# EAGLE board ai_breakout_mics5524_panel (EAGLE 6.6.0)
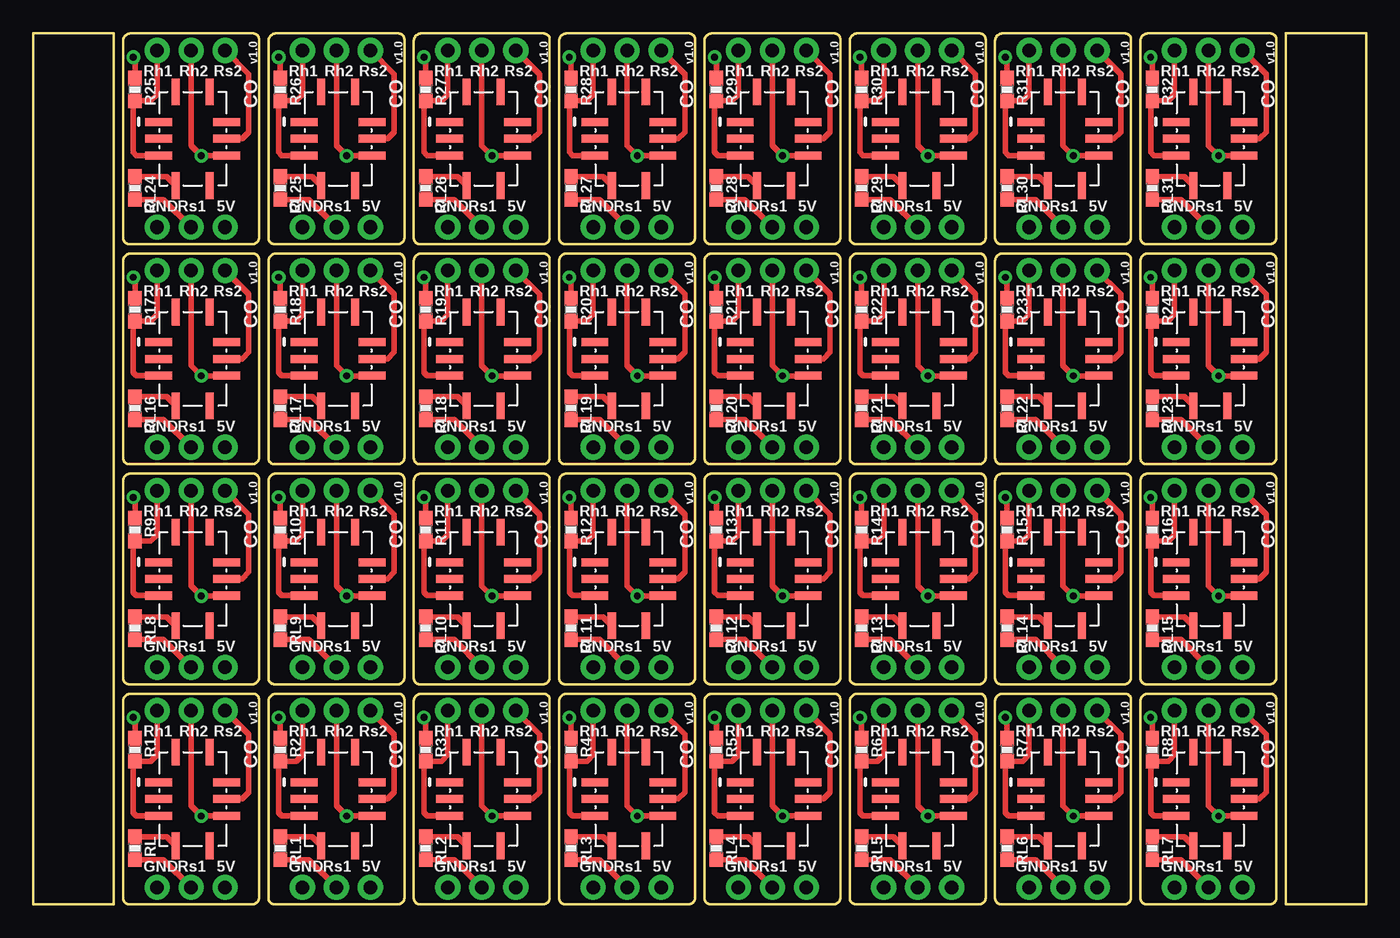
[diagram p0: board, top side]
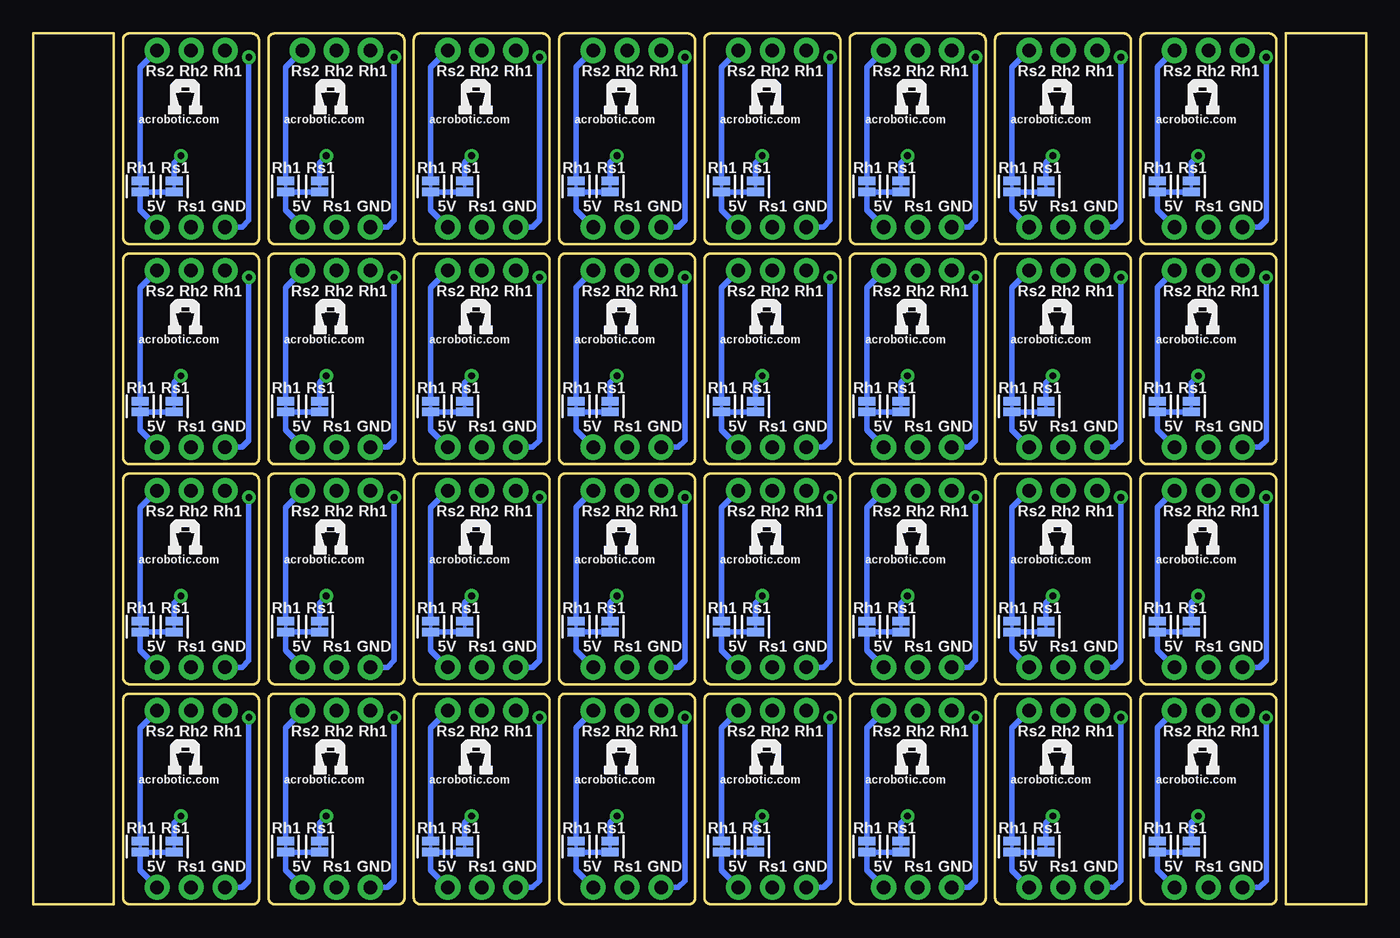
[diagram p1: board, bottom side, seen from below]

Size 99.58 x 65.09 mm. Coordinates in mm from the lower left corner, seen from the top.
Outline: 264 segments
Copper layers (1*16): Top 0.035mm / dielectric 1.5mm / Bottom 0.035mm
Design rules "ai_2layer": minimum track width 7mil, minimum drill 15mil, track to track 8mil, track to pad 8mil, pad to pad 8mil, via to via 8mil, smd to smd 8mil, copper to edge 8mil, drill to drill 8mil, minimum pad ring 12mil, minimum via ring 10mil, stop-mask expansion 4mil, vias tented up to drill 20mil, thermal gap 10mil
Net classes: 0 signal: width 0.254 mm; 1 power: width 0.305 mm

## Footprints (pad centres in the part's own frame; a part is rotated, then mirrored left to right if it is on the bottom)
1X03-NOFIRST = drill 1.016 pad 1.88: 1 -2.54,0; 2 0,0; 3 2.54,0
1X02-SJ-NCT = smd 0.635 x 1.27: 1 -0.401,0; 2 0.413,0
RES-0603 = smd 1.1 x 1: 1 -0.85,0; 2 0.85,0
MICS-SMD10 = smd 0.6 x 2: A -1.25,-2.54; B 0,-2.54; C 1.25,-2.54; F 1.25,2.54; G 0,2.54; H -1.25,2.54 | smd 2 x 0.6: D 3.5,-1.27; E 3.5,1.27; J -3.5,1.27; K -3.5,-1.27

## Placement (x,y rotation side)
J1  1X03NOFIRST  [1X03-NOFIRST]  11.78,14.48 180 top
J2  1X03NOFIRST  [1X03-NOFIRST]  11.78,1.27 180 top
J3  1X03NOFIRST  [1X03-NOFIRST]  22.64,14.48 180 top
J4  1X03NOFIRST  [1X03-NOFIRST]  22.64,1.27 180 top
J5  1X03NOFIRST  [1X03-NOFIRST]  33.5,14.48 180 top
J6  1X03NOFIRST  [1X03-NOFIRST]  33.5,1.27 180 top
J7  1X03NOFIRST  [1X03-NOFIRST]  44.36,14.48 180 top
J8  1X03NOFIRST  [1X03-NOFIRST]  44.36,1.27 180 top
J9  1X03NOFIRST  [1X03-NOFIRST]  55.22,14.48 180 top
J10  1X03NOFIRST  [1X03-NOFIRST]  55.22,1.27 180 top
J11  1X03NOFIRST  [1X03-NOFIRST]  66.08,14.48 180 top
J12  1X03NOFIRST  [1X03-NOFIRST]  66.08,1.27 180 top
J13  1X03NOFIRST  [1X03-NOFIRST]  76.94,14.48 180 top
J14  1X03NOFIRST  [1X03-NOFIRST]  76.94,1.27 180 top
J15  1X03NOFIRST  [1X03-NOFIRST]  87.8,14.48 180 top
J16  1X03NOFIRST  [1X03-NOFIRST]  87.8,1.27 180 top
J17  1X03NOFIRST  [1X03-NOFIRST]  11.78,30.93 180 top
J18  1X03NOFIRST  [1X03-NOFIRST]  11.78,17.72 180 top
J19  1X03NOFIRST  [1X03-NOFIRST]  22.64,30.93 180 top
J20  1X03NOFIRST  [1X03-NOFIRST]  22.64,17.72 180 top
J21  1X03NOFIRST  [1X03-NOFIRST]  33.5,30.93 180 top
J22  1X03NOFIRST  [1X03-NOFIRST]  33.5,17.72 180 top
J23  1X03NOFIRST  [1X03-NOFIRST]  44.36,30.93 180 top
J24  1X03NOFIRST  [1X03-NOFIRST]  44.36,17.72 180 top
J25  1X03NOFIRST  [1X03-NOFIRST]  55.22,30.93 180 top
J26  1X03NOFIRST  [1X03-NOFIRST]  55.22,17.72 180 top
J27  1X03NOFIRST  [1X03-NOFIRST]  66.08,30.93 180 top
J28  1X03NOFIRST  [1X03-NOFIRST]  66.08,17.72 180 top
J29  1X03NOFIRST  [1X03-NOFIRST]  76.94,30.93 180 top
J30  1X03NOFIRST  [1X03-NOFIRST]  76.94,17.72 180 top
J31  1X03NOFIRST  [1X03-NOFIRST]  87.8,30.93 180 top
J32  1X03NOFIRST  [1X03-NOFIRST]  87.8,17.72 180 top
J33  1X03NOFIRST  [1X03-NOFIRST]  11.78,47.37 180 top
J34  1X03NOFIRST  [1X03-NOFIRST]  11.78,34.17 180 top
J35  1X03NOFIRST  [1X03-NOFIRST]  22.64,47.37 180 top
J36  1X03NOFIRST  [1X03-NOFIRST]  22.64,34.17 180 top
J37  1X03NOFIRST  [1X03-NOFIRST]  33.5,47.37 180 top
J38  1X03NOFIRST  [1X03-NOFIRST]  33.5,34.17 180 top
J39  1X03NOFIRST  [1X03-NOFIRST]  44.36,47.37 180 top
J40  1X03NOFIRST  [1X03-NOFIRST]  44.36,34.17 180 top
J41  1X03NOFIRST  [1X03-NOFIRST]  55.22,47.37 180 top
J42  1X03NOFIRST  [1X03-NOFIRST]  55.22,34.17 180 top
J43  1X03NOFIRST  [1X03-NOFIRST]  66.08,47.37 180 top
J44  1X03NOFIRST  [1X03-NOFIRST]  66.08,34.17 180 top
J45  1X03NOFIRST  [1X03-NOFIRST]  76.94,47.37 180 top
J46  1X03NOFIRST  [1X03-NOFIRST]  76.94,34.17 180 top
J47  1X03NOFIRST  [1X03-NOFIRST]  87.8,47.37 180 top
J48  1X03NOFIRST  [1X03-NOFIRST]  87.8,34.17 180 top
J49  1X03NOFIRST  [1X03-NOFIRST]  11.78,63.82 180 top
J50  1X03NOFIRST  [1X03-NOFIRST]  11.78,50.61 180 top
J51  1X03NOFIRST  [1X03-NOFIRST]  22.64,63.82 180 top
J52  1X03NOFIRST  [1X03-NOFIRST]  22.64,50.61 180 top
J53  1X03NOFIRST  [1X03-NOFIRST]  33.5,63.82 180 top
J54  1X03NOFIRST  [1X03-NOFIRST]  33.5,50.61 180 top
J55  1X03NOFIRST  [1X03-NOFIRST]  44.36,63.82 180 top
J56  1X03NOFIRST  [1X03-NOFIRST]  44.36,50.61 180 top
J57  1X03NOFIRST  [1X03-NOFIRST]  55.22,63.82 180 top
J58  1X03NOFIRST  [1X03-NOFIRST]  55.22,50.61 180 top
J59  1X03NOFIRST  [1X03-NOFIRST]  66.08,63.82 180 top
J60  1X03NOFIRST  [1X03-NOFIRST]  66.08,50.61 180 top
J61  1X03NOFIRST  [1X03-NOFIRST]  76.94,63.82 180 top
J62  1X03NOFIRST  [1X03-NOFIRST]  76.94,50.61 180 top
J63  1X03NOFIRST  [1X03-NOFIRST]  87.8,63.82 180 top
J64  1X03NOFIRST  [1X03-NOFIRST]  87.8,50.61 180 top
JS1  1X02-SJ-NCT  [1X02-SJ-NCT]  15.59,4.32 270 bottom
JS2  1X02-SJ-NCT  [1X02-SJ-NCT]  13.05,4.32 270 bottom
JS3  1X02-SJ-NCT  [1X02-SJ-NCT]  26.45,4.32 270 bottom
JS4  1X02-SJ-NCT  [1X02-SJ-NCT]  23.91,4.32 270 bottom
JS5  1X02-SJ-NCT  [1X02-SJ-NCT]  37.31,4.32 270 bottom
JS6  1X02-SJ-NCT  [1X02-SJ-NCT]  34.77,4.32 270 bottom
JS7  1X02-SJ-NCT  [1X02-SJ-NCT]  48.17,4.32 270 bottom
JS8  1X02-SJ-NCT  [1X02-SJ-NCT]  45.63,4.32 270 bottom
JS9  1X02-SJ-NCT  [1X02-SJ-NCT]  59.03,4.32 270 bottom
JS10  1X02-SJ-NCT  [1X02-SJ-NCT]  56.49,4.32 270 bottom
JS11  1X02-SJ-NCT  [1X02-SJ-NCT]  69.89,4.32 270 bottom
JS12  1X02-SJ-NCT  [1X02-SJ-NCT]  67.35,4.32 270 bottom
JS13  1X02-SJ-NCT  [1X02-SJ-NCT]  80.75,4.32 270 bottom
JS14  1X02-SJ-NCT  [1X02-SJ-NCT]  78.21,4.32 270 bottom
JS15  1X02-SJ-NCT  [1X02-SJ-NCT]  91.61,4.32 270 bottom
JS16  1X02-SJ-NCT  [1X02-SJ-NCT]  89.07,4.32 270 bottom
JS17  1X02-SJ-NCT  [1X02-SJ-NCT]  15.59,20.77 270 bottom
JS18  1X02-SJ-NCT  [1X02-SJ-NCT]  13.05,20.77 270 bottom
JS19  1X02-SJ-NCT  [1X02-SJ-NCT]  26.45,20.77 270 bottom
JS20  1X02-SJ-NCT  [1X02-SJ-NCT]  23.91,20.77 270 bottom
JS21  1X02-SJ-NCT  [1X02-SJ-NCT]  37.31,20.77 270 bottom
JS22  1X02-SJ-NCT  [1X02-SJ-NCT]  34.77,20.77 270 bottom
JS23  1X02-SJ-NCT  [1X02-SJ-NCT]  48.17,20.77 270 bottom
JS24  1X02-SJ-NCT  [1X02-SJ-NCT]  45.63,20.77 270 bottom
JS25  1X02-SJ-NCT  [1X02-SJ-NCT]  59.03,20.77 270 bottom
JS26  1X02-SJ-NCT  [1X02-SJ-NCT]  56.49,20.77 270 bottom
JS27  1X02-SJ-NCT  [1X02-SJ-NCT]  69.89,20.77 270 bottom
JS28  1X02-SJ-NCT  [1X02-SJ-NCT]  67.35,20.77 270 bottom
JS29  1X02-SJ-NCT  [1X02-SJ-NCT]  80.75,20.77 270 bottom
JS30  1X02-SJ-NCT  [1X02-SJ-NCT]  78.21,20.77 270 bottom
JS31  1X02-SJ-NCT  [1X02-SJ-NCT]  91.61,20.77 270 bottom
JS32  1X02-SJ-NCT  [1X02-SJ-NCT]  89.07,20.77 270 bottom
JS33  1X02-SJ-NCT  [1X02-SJ-NCT]  15.59,37.21 270 bottom
JS34  1X02-SJ-NCT  [1X02-SJ-NCT]  13.05,37.21 270 bottom
JS35  1X02-SJ-NCT  [1X02-SJ-NCT]  26.45,37.21 270 bottom
JS36  1X02-SJ-NCT  [1X02-SJ-NCT]  23.91,37.21 270 bottom
JS37  1X02-SJ-NCT  [1X02-SJ-NCT]  37.31,37.21 270 bottom
JS38  1X02-SJ-NCT  [1X02-SJ-NCT]  34.77,37.21 270 bottom
JS39  1X02-SJ-NCT  [1X02-SJ-NCT]  48.17,37.21 270 bottom
JS40  1X02-SJ-NCT  [1X02-SJ-NCT]  45.63,37.21 270 bottom
JS41  1X02-SJ-NCT  [1X02-SJ-NCT]  59.03,37.21 270 bottom
JS42  1X02-SJ-NCT  [1X02-SJ-NCT]  56.49,37.21 270 bottom
JS43  1X02-SJ-NCT  [1X02-SJ-NCT]  69.89,37.21 270 bottom
JS44  1X02-SJ-NCT  [1X02-SJ-NCT]  67.35,37.21 270 bottom
JS45  1X02-SJ-NCT  [1X02-SJ-NCT]  80.75,37.21 270 bottom
JS46  1X02-SJ-NCT  [1X02-SJ-NCT]  78.21,37.21 270 bottom
JS47  1X02-SJ-NCT  [1X02-SJ-NCT]  91.61,37.21 270 bottom
JS48  1X02-SJ-NCT  [1X02-SJ-NCT]  89.07,37.21 270 bottom
JS49  1X02-SJ-NCT  [1X02-SJ-NCT]  15.59,53.66 270 bottom
JS50  1X02-SJ-NCT  [1X02-SJ-NCT]  13.05,53.66 270 bottom
JS51  1X02-SJ-NCT  [1X02-SJ-NCT]  26.45,53.66 270 bottom
JS52  1X02-SJ-NCT  [1X02-SJ-NCT]  23.91,53.66 270 bottom
JS53  1X02-SJ-NCT  [1X02-SJ-NCT]  37.31,53.66 270 bottom
JS54  1X02-SJ-NCT  [1X02-SJ-NCT]  34.77,53.66 270 bottom
JS55  1X02-SJ-NCT  [1X02-SJ-NCT]  48.17,53.66 270 bottom
JS56  1X02-SJ-NCT  [1X02-SJ-NCT]  45.63,53.66 270 bottom
JS57  1X02-SJ-NCT  [1X02-SJ-NCT]  59.03,53.66 270 bottom
JS58  1X02-SJ-NCT  [1X02-SJ-NCT]  56.49,53.66 270 bottom
JS59  1X02-SJ-NCT  [1X02-SJ-NCT]  69.89,53.66 270 bottom
JS60  1X02-SJ-NCT  [1X02-SJ-NCT]  67.35,53.66 270 bottom
JS61  1X02-SJ-NCT  [1X02-SJ-NCT]  80.75,53.66 270 bottom
JS62  1X02-SJ-NCT  [1X02-SJ-NCT]  78.21,53.66 270 bottom
JS63  1X02-SJ-NCT  [1X02-SJ-NCT]  91.61,53.66 270 bottom
JS64  1X02-SJ-NCT  [1X02-SJ-NCT]  89.07,53.66 270 bottom
R1  82  [RES-0603]  7.59,11.56 270 top
R2  82  [RES-0603]  18.45,11.56 270 top
R3  82  [RES-0603]  29.31,11.56 270 top
R4  82  [RES-0603]  40.17,11.56 270 top
R5  82  [RES-0603]  51.03,11.56 270 top
R6  82  [RES-0603]  61.89,11.56 270 top
R7  82  [RES-0603]  72.75,11.56 270 top
R8  82  [RES-0603]  83.61,11.56 270 top
R9  82  [RES-0603]  7.59,28 270 top
R10  82  [RES-0603]  18.45,28 270 top
R11  82  [RES-0603]  29.31,28 270 top
R12  82  [RES-0603]  40.17,28 270 top
R13  82  [RES-0603]  51.03,28 270 top
R14  82  [RES-0603]  61.89,28 270 top
R15  82  [RES-0603]  72.75,28 270 top
R16  82  [RES-0603]  83.61,28 270 top
R17  82  [RES-0603]  7.59,44.45 270 top
R18  82  [RES-0603]  18.45,44.45 270 top
R19  82  [RES-0603]  29.31,44.45 270 top
R20  82  [RES-0603]  40.17,44.45 270 top
R21  82  [RES-0603]  51.03,44.45 270 top
R22  82  [RES-0603]  61.89,44.45 270 top
R23  82  [RES-0603]  72.75,44.45 270 top
R24  82  [RES-0603]  83.61,44.45 270 top
R25  82  [RES-0603]  7.59,60.9 270 top
R26  82  [RES-0603]  18.45,60.9 270 top
R27  82  [RES-0603]  29.31,60.9 270 top
R28  82  [RES-0603]  40.17,60.9 270 top
R29  82  [RES-0603]  51.03,60.9 270 top
R30  82  [RES-0603]  61.89,60.9 270 top
R31  82  [RES-0603]  72.75,60.9 270 top
R32  82  [RES-0603]  83.61,60.9 270 top
RL  820  [RES-0603]  7.59,4.19 270 top
RL1  820  [RES-0603]  18.45,4.19 270 top
RL2  820  [RES-0603]  29.31,4.19 270 top
RL3  820  [RES-0603]  40.17,4.19 270 top
RL4  820  [RES-0603]  51.03,4.19 270 top
RL5  820  [RES-0603]  61.89,4.19 270 top
RL6  820  [RES-0603]  72.75,4.19 270 top
RL7  820  [RES-0603]  83.61,4.19 270 top
RL8  820  [RES-0603]  7.59,20.64 270 top
RL9  820  [RES-0603]  18.45,20.64 270 top
RL10  820  [RES-0603]  29.31,20.64 270 top
RL11  820  [RES-0603]  40.17,20.64 270 top
RL12  820  [RES-0603]  51.03,20.64 270 top
RL13  820  [RES-0603]  61.89,20.64 270 top
RL14  820  [RES-0603]  72.75,20.64 270 top
RL15  820  [RES-0603]  83.61,20.64 270 top
RL16  820  [RES-0603]  7.59,37.09 270 top
RL17  820  [RES-0603]  18.45,37.09 270 top
RL18  820  [RES-0603]  29.31,37.09 270 top
RL19  820  [RES-0603]  40.17,37.09 270 top
RL20  820  [RES-0603]  51.03,37.09 270 top
RL21  820  [RES-0603]  61.89,37.09 270 top
RL22  820  [RES-0603]  72.75,37.09 270 top
RL23  820  [RES-0603]  83.61,37.09 270 top
RL24  820  [RES-0603]  7.59,53.53 270 top
RL25  820  [RES-0603]  18.45,53.53 270 top
RL26  820  [RES-0603]  29.31,53.53 270 top
RL27  820  [RES-0603]  40.17,53.53 270 top
RL28  820  [RES-0603]  51.03,53.53 270 top
RL29  820  [RES-0603]  61.89,53.53 270 top
RL30  820  [RES-0603]  72.75,53.53 270 top
RL31  820  [RES-0603]  83.61,53.53 270 top
U1  MICS-5524  [MICS-SMD10]  22.77,7.87 270 top
U2  MICS-5524  [MICS-SMD10]  11.91,7.87 270 top
U3  MICS-5524  [MICS-SMD10]  33.63,7.87 270 top
U4  MICS-5524  [MICS-SMD10]  44.49,7.87 270 top
U5  MICS-5524  [MICS-SMD10]  55.35,7.87 270 top
U6  MICS-5524  [MICS-SMD10]  66.21,7.87 270 top
U7  MICS-5524  [MICS-SMD10]  77.07,7.87 270 top
U8  MICS-5524  [MICS-SMD10]  87.93,7.87 270 top
U9  MICS-5524  [MICS-SMD10]  11.91,24.32 270 top
U10  MICS-5524  [MICS-SMD10]  22.77,24.32 270 top
U11  MICS-5524  [MICS-SMD10]  33.63,24.32 270 top
U12  MICS-5524  [MICS-SMD10]  44.49,24.32 270 top
U13  MICS-5524  [MICS-SMD10]  55.35,24.32 270 top
U14  MICS-5524  [MICS-SMD10]  66.21,24.32 270 top
U15  MICS-5524  [MICS-SMD10]  77.07,24.32 270 top
U16  MICS-5524  [MICS-SMD10]  87.93,24.32 270 top
U17  MICS-5524  [MICS-SMD10]  11.91,40.77 270 top
U18  MICS-5524  [MICS-SMD10]  22.77,40.77 270 top
U19  MICS-5524  [MICS-SMD10]  33.63,40.77 270 top
U20  MICS-5524  [MICS-SMD10]  44.49,40.77 270 top
U21  MICS-5524  [MICS-SMD10]  55.35,40.77 270 top
U22  MICS-5524  [MICS-SMD10]  66.21,40.77 270 top
U23  MICS-5524  [MICS-SMD10]  77.07,40.77 270 top
U24  MICS-5524  [MICS-SMD10]  87.93,40.77 270 top
U25  MICS-5524  [MICS-SMD10]  11.91,57.22 270 top
U26  MICS-5524  [MICS-SMD10]  22.77,57.22 270 top
U27  MICS-5524  [MICS-SMD10]  33.63,57.22 270 top
U28  MICS-5524  [MICS-SMD10]  44.49,57.22 270 top
U29  MICS-5524  [MICS-SMD10]  55.35,57.22 270 top
U30  MICS-5524  [MICS-SMD10]  66.21,57.22 270 top
U31  MICS-5524  [MICS-SMD10]  77.07,57.22 270 top
U32  MICS-5524  [MICS-SMD10]  87.93,57.22 270 top
U$1  AI-LOGOXS  [AI-LOGO-XS]  24.42,9.65 0 bottom
U$2  AI-LOGOXS  [AI-LOGO-XS]  35.28,9.65 0 bottom
U$3  AI-LOGOXS  [AI-LOGO-XS]  13.56,9.65 0 bottom
U$4  AI-LOGOXS  [AI-LOGO-XS]  46.14,9.65 0 bottom
U$5  AI-LOGOXS  [AI-LOGO-XS]  57,9.65 0 bottom
U$6  AI-LOGOXS  [AI-LOGO-XS]  67.86,9.65 0 bottom
U$7  AI-LOGOXS  [AI-LOGO-XS]  78.72,9.65 0 bottom
U$8  AI-LOGOXS  [AI-LOGO-XS]  89.58,9.65 0 bottom
U$9  AI-LOGOXS  [AI-LOGO-XS]  13.56,26.1 0 bottom
U$10  AI-LOGOXS  [AI-LOGO-XS]  24.42,26.1 0 bottom
U$11  AI-LOGOXS  [AI-LOGO-XS]  35.28,26.1 0 bottom
U$12  AI-LOGOXS  [AI-LOGO-XS]  46.14,26.1 0 bottom
U$13  AI-LOGOXS  [AI-LOGO-XS]  57,26.1 0 bottom
U$14  AI-LOGOXS  [AI-LOGO-XS]  67.86,26.1 0 bottom
U$15  AI-LOGOXS  [AI-LOGO-XS]  78.72,26.1 0 bottom
U$16  AI-LOGOXS  [AI-LOGO-XS]  89.58,26.1 0 bottom
U$17  AI-LOGOXS  [AI-LOGO-XS]  13.56,42.55 0 bottom
U$18  AI-LOGOXS  [AI-LOGO-XS]  24.42,42.55 0 bottom
U$19  AI-LOGOXS  [AI-LOGO-XS]  35.28,42.55 0 bottom
U$20  AI-LOGOXS  [AI-LOGO-XS]  46.14,42.55 0 bottom
U$21  AI-LOGOXS  [AI-LOGO-XS]  57,42.55 0 bottom
U$22  AI-LOGOXS  [AI-LOGO-XS]  67.86,42.55 0 bottom
U$23  AI-LOGOXS  [AI-LOGO-XS]  78.72,42.55 0 bottom
U$24  AI-LOGOXS  [AI-LOGO-XS]  89.58,42.55 0 bottom
U$25  AI-LOGOXS  [AI-LOGO-XS]  13.56,59 0 bottom
U$26  AI-LOGOXS  [AI-LOGO-XS]  24.42,59 0 bottom
U$27  AI-LOGOXS  [AI-LOGO-XS]  35.28,59 0 bottom
U$28  AI-LOGOXS  [AI-LOGO-XS]  46.14,59 0 bottom
U$29  AI-LOGOXS  [AI-LOGO-XS]  57,59 0 bottom
U$30  AI-LOGOXS  [AI-LOGO-XS]  67.86,59 0 bottom
U$31  AI-LOGOXS  [AI-LOGO-XS]  78.72,59 0 bottom
U$32  AI-LOGOXS  [AI-LOGO-XS]  89.58,59 0 bottom

## Library data of the parts
J1-J64 JS1-JS64 = Ai_Connectors
R1-R32 RL RL1-RL31 = Ai_Passives
U1-U32 = Ai_IC
U$1-U$32 = Ai_Miscellany

## Nets
5V [power]: J2.1 JS1.2 JS2.2
5V1 [power]: J4.1 JS3.2 JS4.2
5V2 [power]: J6.1 JS5.2 JS6.2
5V3 [power]: J8.1 JS7.2 JS8.2
5V4 [power]: J10.1 JS9.2 JS10.2
5V5 [power]: J12.1 JS11.2 JS12.2
5V6 [power]: J14.1 JS13.2 JS14.2
5V7 [power]: J16.1 JS15.2 JS16.2
5V8 [power]: J18.1 JS17.2 JS18.2
5V9 [power]: J20.1 JS19.2 JS20.2
5V10 [power]: J22.1 JS21.2 JS22.2
5V11 [power]: J24.1 JS23.2 JS24.2
5V12 [power]: J26.1 JS25.2 JS26.2
5V13 [power]: J28.1 JS27.2 JS28.2
5V14 [power]: J30.1 JS29.2 JS30.2
5V15 [power]: J32.1 JS31.2 JS32.2
5V16 [power]: J34.1 JS33.2 JS34.2
5V17 [power]: J36.1 JS35.2 JS36.2
5V18 [power]: J38.1 JS37.2 JS38.2
5V19 [power]: J40.1 JS39.2 JS40.2
5V20 [power]: J42.1 JS41.2 JS42.2
5V21 [power]: J44.1 JS43.2 JS44.2
5V22 [power]: J46.1 JS45.2 JS46.2
5V23 [power]: J48.1 JS47.2 JS48.2
5V24 [power]: J50.1 JS49.2 JS50.2
5V25 [power]: J52.1 JS51.2 JS52.2
5V26 [power]: J54.1 JS53.2 JS54.2
5V27 [power]: J56.1 JS55.2 JS56.2
5V28 [power]: J58.1 JS57.2 JS58.2
5V29 [power]: J60.1 JS59.2 JS60.2
5V30 [power]: J62.1 JS61.2 JS62.2
5V31 [power]: J64.1 JS63.2 JS64.2
A/RH1: J1.3 R1.2 U2.C
A/RH2: J3.3 R2.2 U1.C
A/RH3: J5.3 R3.2 U3.C
A/RH4: J7.3 R4.2 U4.C
A/RH5: J9.3 R5.2 U5.C
A/RH6: J11.3 R6.2 U6.C
A/RH7: J13.3 R7.2 U7.C
A/RH8: J15.3 R8.2 U8.C
A/RH9: J17.3 R9.2 U9.C
A/RH10: J19.3 R10.2 U10.C
A/RH11: J21.3 R11.2 U11.C
A/RH12: J23.3 R12.2 U12.C
A/RH13: J25.3 R13.2 U13.C
A/RH14: J27.3 R14.2 U14.C
A/RH15: J29.3 R15.2 U15.C
A/RH16: J31.3 R16.2 U16.C
A/RH17: J33.3 R17.2 U17.C
A/RH18: J35.3 R18.2 U18.C
A/RH19: J37.3 R19.2 U19.C
A/RH20: J39.3 R20.2 U20.C
A/RH21: J41.3 R21.2 U21.C
A/RH22: J43.3 R22.2 U22.C
A/RH23: J45.3 R23.2 U23.C
A/RH24: J47.3 R24.2 U24.C
A/RH25: J49.3 R25.2 U25.C
A/RH26: J51.3 R26.2 U26.C
A/RH27: J53.3 R27.2 U27.C
A/RH28: J55.3 R28.2 U28.C
A/RH29: J57.3 R29.2 U29.C
A/RH30: J59.3 R30.2 U30.C
A/RH31: J61.3 R31.2 U31.C
A/RH32: J63.3 R32.2 U32.C
B/RS1: J2.2 RL.2
B/RS2: J4.2 RL1.2
B/RS3: J6.2 RL2.2
B/RS4: J8.2 RL3.2
B/RS5: J10.2 RL4.2
B/RS6: J12.2 RL5.2
B/RS7: J14.2 RL6.2
B/RS8: J16.2 RL7.2
B/RS9: J18.2 RL8.2
B/RS10: J20.2 RL9.2
B/RS11: J22.2 RL10.2
B/RS12: J24.2 RL11.2
B/RS13: J26.2 RL12.2
B/RS14: J28.2 RL13.2
B/RS15: J30.2 RL14.2
B/RS16: J32.2 RL15.2
B/RS17: J34.2 RL16.2
B/RS18: J36.2 RL17.2
B/RS19: J38.2 RL18.2
B/RS20: J40.2 RL19.2
B/RS21: J42.2 RL20.2
B/RS22: J44.2 RL21.2
B/RS23: J46.2 RL22.2
B/RS24: J48.2 RL23.2
B/RS25: J50.2 RL24.2
B/RS26: J52.2 RL25.2
B/RS27: J54.2 RL26.2
B/RS28: J56.2 RL27.2
B/RS29: J58.2 RL28.2
B/RS30: J60.2 RL29.2
B/RS31: J62.2 RL30.2
B/RS32: J64.2 RL31.2
GND [power]: J2.3 R1.1
GND1 [power]: J4.3 R2.1
GND2 [power]: J6.3 R3.1
GND3 [power]: J8.3 R4.1
GND4 [power]: J10.3 R5.1
GND5 [power]: J12.3 R6.1
GND6 [power]: J14.3 R7.1
GND7 [power]: J16.3 R8.1
GND8 [power]: J18.3 R9.1
GND9 [power]: J20.3 R10.1
GND10 [power]: J22.3 R11.1
GND11 [power]: J24.3 R12.1
GND12 [power]: J26.3 R13.1
GND13 [power]: J28.3 R14.1
GND14 [power]: J30.3 R15.1
GND15 [power]: J32.3 R16.1
GND16 [power]: J34.3 R17.1
GND17 [power]: J36.3 R18.1
GND18 [power]: J38.3 R19.1
GND19 [power]: J40.3 R20.1
GND20 [power]: J42.3 R21.1
GND21 [power]: J44.3 R22.1
GND22 [power]: J46.3 R23.1
GND23 [power]: J48.3 R24.1
GND24 [power]: J50.3 R25.1
GND25 [power]: J52.3 R26.1
GND26 [power]: J54.3 R27.1
GND27 [power]: J56.3 R28.1
GND28 [power]: J58.3 R29.1
GND29 [power]: J60.3 R30.1
GND30 [power]: J62.3 R31.1
GND31 [power]: J64.3 R32.1
H/RH1: J3.2 JS4.1 U1.F
H/RH2: J1.2 JS2.1 U2.F
H/RH3: J5.2 JS6.1 U3.F
H/RH4: J7.2 JS8.1 U4.F
H/RH5: J9.2 JS10.1 U5.F
H/RH6: J11.2 JS12.1 U6.F
H/RH7: J13.2 JS14.1 U7.F
H/RH8: J15.2 JS16.1 U8.F
H/RH9: J17.2 JS18.1 U9.F
H/RH10: J19.2 JS20.1 U10.F
H/RH11: J21.2 JS22.1 U11.F
H/RH12: J23.2 JS24.1 U12.F
H/RH13: J25.2 JS26.1 U13.F
H/RH14: J27.2 JS28.1 U14.F
H/RH15: J29.2 JS30.1 U15.F
H/RH16: J31.2 JS32.1 U16.F
H/RH17: J33.2 JS34.1 U17.F
H/RH18: J35.2 JS36.1 U18.F
H/RH19: J37.2 JS38.1 U19.F
H/RH20: J39.2 JS40.1 U20.F
H/RH21: J41.2 JS42.1 U21.F
H/RH22: J43.2 JS44.1 U22.F
H/RH23: J45.2 JS46.1 U23.F
H/RH24: J47.2 JS48.1 U24.F
H/RH25: J49.2 JS50.1 U25.F
H/RH26: J51.2 JS52.1 U26.F
H/RH27: J53.2 JS54.1 U27.F
H/RH28: J55.2 JS56.1 U28.F
H/RH29: J57.2 JS58.1 U29.F
H/RH30: J59.2 JS60.1 U30.F
H/RH31: J61.2 JS62.1 U31.F
H/RH32: J63.2 JS64.1 U32.F
J/RS1: J3.1 JS3.1 U1.G
J/RS2: J1.1 JS1.1 U2.G
J/RS3: J5.1 JS5.1 U3.G
J/RS4: J7.1 JS7.1 U4.G
J/RS5: J9.1 JS9.1 U5.G
J/RS6: J11.1 JS11.1 U6.G
J/RS7: J13.1 JS13.1 U7.G
J/RS8: J15.1 JS15.1 U8.G
J/RS9: J17.1 JS17.1 U9.G
J/RS10: J19.1 JS19.1 U10.G
J/RS11: J21.1 JS21.1 U11.G
J/RS12: J23.1 JS23.1 U12.G
J/RS13: J25.1 JS25.1 U13.G
J/RS14: J27.1 JS27.1 U14.G
J/RS15: J29.1 JS29.1 U15.G
J/RS16: J31.1 JS31.1 U16.G
J/RS17: J33.1 JS33.1 U17.G
J/RS18: J35.1 JS35.1 U18.G
J/RS19: J37.1 JS37.1 U19.G
J/RS20: J39.1 JS39.1 U20.G
J/RS21: J41.1 JS41.1 U21.G
J/RS22: J43.1 JS43.1 U22.G
J/RS23: J45.1 JS45.1 U23.G
J/RS24: J47.1 JS47.1 U24.G
J/RS25: J49.1 JS49.1 U25.G
J/RS26: J51.1 JS51.1 U26.G
J/RS27: J53.1 JS53.1 U27.G
J/RS28: J55.1 JS55.1 U28.G
J/RS29: J57.1 JS57.1 U29.G
J/RS30: J59.1 JS59.1 U30.G
J/RS31: J61.1 JS61.1 U31.G
J/RS32: J63.1 JS63.1 U32.G
N$1: RL.1 U2.D
N$2: RL1.1 U1.D
N$3: RL2.1 U3.D
N$4: RL3.1 U4.D
N$5: RL4.1 U5.D
N$6: RL5.1 U6.D
N$7: RL6.1 U7.D
N$8: RL7.1 U8.D
N$9: RL8.1 U9.D
N$10: RL9.1 U10.D
N$11: RL10.1 U11.D
N$12: RL11.1 U12.D
N$13: RL12.1 U13.D
N$14: RL13.1 U14.D
N$15: RL14.1 U15.D
N$16: RL15.1 U16.D
N$17: RL16.1 U17.D
N$18: RL17.1 U18.D
N$19: RL18.1 U19.D
N$20: RL19.1 U20.D
N$21: RL20.1 U21.D
N$22: RL21.1 U22.D
N$23: RL22.1 U23.D
N$24: RL23.1 U24.D
N$25: RL24.1 U25.D
N$26: RL25.1 U26.D
N$27: RL26.1 U27.D
N$28: RL27.1 U28.D
N$29: RL28.1 U29.D
N$30: RL29.1 U30.D
N$31: RL30.1 U31.D
N$32: RL31.1 U32.D

## Tracks (layer width: path | path; a pad name or v marks a point on that pad's centre or on a via)
5V
  Bottom 0.406: J2.1 15.59,2.54 JS1.2 JS2.2
5V1
  Bottom 0.406: J4.1 26.45,2.54 JS3.2 JS4.2
5V2
  Bottom 0.406: J6.1 37.31,2.54 JS5.2 JS6.2
5V3
  Bottom 0.406: J8.1 48.17,2.54 JS7.2 JS8.2
5V4
  Bottom 0.406: J10.1 59.03,2.54 JS9.2 JS10.2
5V5
  Bottom 0.406: J12.1 69.89,2.54 JS11.2 JS12.2
5V6
  Bottom 0.406: J14.1 80.75,2.54 JS13.2 JS14.2
5V7
  Bottom 0.406: J16.1 91.61,2.54 JS15.2 JS16.2
5V8
  Bottom 0.406: J18.1 15.59,18.99 JS17.2 JS18.2
5V9
  Bottom 0.406: J20.1 26.45,18.99 JS19.2 JS20.2
5V10
  Bottom 0.406: J22.1 37.31,18.99 JS21.2 JS22.2
5V11
  Bottom 0.406: J24.1 48.17,18.99 JS23.2 JS24.2
5V12
  Bottom 0.406: J26.1 59.03,18.99 JS25.2 JS26.2
5V13
  Bottom 0.406: J28.1 69.89,18.99 JS27.2 JS28.2
5V14
  Bottom 0.406: J30.1 80.75,18.99 JS29.2 JS30.2
5V15
  Bottom 0.406: J32.1 91.61,18.99 JS31.2 JS32.2
5V16
  Bottom 0.406: J34.1 15.59,35.44 JS33.2 JS34.2
5V17
  Bottom 0.406: J36.1 26.45,35.44 JS35.2 JS36.2
5V18
  Bottom 0.406: J38.1 37.31,35.44 JS37.2 JS38.2
5V19
  Bottom 0.406: J40.1 48.17,35.44 JS39.2 JS40.2
5V20
  Bottom 0.406: J42.1 59.03,35.44 JS41.2 JS42.2
5V21
  Bottom 0.406: J44.1 69.89,35.44 JS43.2 JS44.2
5V22
  Bottom 0.406: J46.1 80.75,35.44 JS45.2 JS46.2
5V23
  Bottom 0.406: J48.1 91.61,35.44 JS47.2 JS48.2
5V24
  Bottom 0.406: J50.1 15.59,51.88 JS49.2 JS50.2
5V25
  Bottom 0.406: J52.1 26.45,51.88 JS51.2 JS52.2
5V26
  Bottom 0.406: J54.1 37.31,51.88 JS53.2 JS54.2
5V27
  Bottom 0.406: J56.1 48.17,51.88 JS55.2 JS56.2
5V28
  Bottom 0.406: J58.1 59.03,51.88 JS57.2 JS58.2
5V29
  Bottom 0.406: J60.1 69.89,51.88 JS59.2 JS60.2
5V30
  Bottom 0.406: J62.1 80.75,51.88 JS61.2 JS62.2
5V31
  Bottom 0.406: J64.1 91.61,51.88 JS63.2 JS64.2
A/RH1
  Top 0.406: U2.C 7.7,6.62 7.46,6.86 7.46,10.58 R1.2 8.77,10.71 9.24,11.18 J1.3
A/RH2
  Top 0.406: U1.C 18.56,6.62 18.32,6.86 18.32,10.58 R2.2 19.63,10.71 20.1,11.18 J3.3
A/RH3
  Top 0.406: U3.C 29.42,6.62 29.18,6.86 29.18,10.58 R3.2 30.49,10.71 30.96,11.18 J5.3
A/RH4
  Top 0.406: U4.C 40.28,6.62 40.04,6.86 40.04,10.58 R4.2 41.35,10.71 41.82,11.18 J7.3
A/RH5
  Top 0.406: U5.C 51.14,6.62 50.9,6.86 50.9,10.58 R5.2 52.21,10.71 52.68,11.18 J9.3
A/RH6
  Top 0.406: U6.C 62,6.62 61.76,6.86 61.76,10.58 R6.2 63.07,10.71 63.54,11.18 J11.3
A/RH7
  Top 0.406: U7.C 72.86,6.62 72.62,6.86 72.62,10.58 R7.2 73.93,10.71 74.4,11.18 J13.3
A/RH8
  Top 0.406: U8.C 83.72,6.62 83.48,6.86 83.48,10.58 R8.2 84.79,10.71 85.26,11.18 J15.3
A/RH9
  Top 0.406: U9.C 7.7,23.07 7.46,23.31 7.46,27.03 R9.2 8.77,27.16 9.24,27.62 J17.3
A/RH10
  Top 0.406: U10.C 18.56,23.07 18.32,23.31 18.32,27.03 R10.2 19.63,27.16 20.1,27.62 J19.3
A/RH11
  Top 0.406: U11.C 29.42,23.07 29.18,23.31 29.18,27.03 R11.2 30.49,27.16 30.96,27.62 J21.3
A/RH12
  Top 0.406: U12.C 40.28,23.07 40.04,23.31 40.04,27.03 R12.2 41.35,27.16 41.82,27.62 J23.3
A/RH13
  Top 0.406: U13.C 51.14,23.07 50.9,23.31 50.9,27.03 R13.2 52.21,27.16 52.68,27.62 J25.3
A/RH14
  Top 0.406: U14.C 62,23.07 61.76,23.31 61.76,27.03 R14.2 63.07,27.16 63.54,27.62 J27.3
A/RH15
  Top 0.406: U15.C 72.86,23.07 72.62,23.31 72.62,27.03 R15.2 73.93,27.16 74.4,27.62 J29.3
A/RH16
  Top 0.406: U16.C 83.72,23.07 83.48,23.31 83.48,27.03 R16.2 84.79,27.16 85.26,27.62 J31.3
A/RH17
  Top 0.406: U17.C 7.7,39.52 7.46,39.75 7.46,43.48 R17.2 8.77,43.6 9.24,44.07 J33.3
A/RH18
  Top 0.406: U18.C 18.56,39.52 18.32,39.75 18.32,43.48 R18.2 19.63,43.6 20.1,44.07 J35.3
A/RH19
  Top 0.406: U19.C 29.42,39.52 29.18,39.75 29.18,43.48 R19.2 30.49,43.6 30.96,44.07 J37.3
A/RH20
  Top 0.406: U20.C 40.28,39.52 40.04,39.75 40.04,43.48 R20.2 41.35,43.6 41.82,44.07 J39.3
A/RH21
  Top 0.406: U21.C 51.14,39.52 50.9,39.75 50.9,43.48 R21.2 52.21,43.6 52.68,44.07 J41.3
A/RH22
  Top 0.406: U22.C 62,39.52 61.76,39.75 61.76,43.48 R22.2 63.07,43.6 63.54,44.07 J43.3
A/RH23
  Top 0.406: U23.C 72.86,39.52 72.62,39.75 72.62,43.48 R23.2 73.93,43.6 74.4,44.07 J45.3
A/RH24
  Top 0.406: U24.C 83.72,39.52 83.48,39.75 83.48,43.48 R24.2 84.79,43.6 85.26,44.07 J47.3
A/RH25
  Top 0.406: U25.C 7.7,55.97 7.46,56.2 7.46,59.92 R25.2 8.77,60.05 9.24,60.52 J49.3
A/RH26
  Top 0.406: U26.C 18.56,55.97 18.32,56.2 18.32,59.92 R26.2 19.63,60.05 20.1,60.52 J51.3
A/RH27
  Top 0.406: U27.C 29.42,55.97 29.18,56.2 29.18,59.92 R27.2 30.49,60.05 30.96,60.52 J53.3
A/RH28
  Top 0.406: U28.C 40.28,55.97 40.04,56.2 40.04,59.92 R28.2 41.35,60.05 41.82,60.52 J55.3
A/RH29
  Top 0.406: U29.C 51.14,55.97 50.9,56.2 50.9,59.92 R29.2 52.21,60.05 52.68,60.52 J57.3
A/RH30
  Top 0.406: U30.C 62,55.97 61.76,56.2 61.76,59.92 R30.2 63.07,60.05 63.54,60.52 J59.3
A/RH31
  Top 0.406: U31.C 72.86,55.97 72.62,56.2 72.62,59.92 R31.2 73.93,60.05 74.4,60.52 J61.3
A/RH32
  Top 0.406: U32.C 83.72,55.97 83.48,56.2 83.48,59.92 R32.2 84.79,60.05 85.26,60.52 J63.3
B/RS1
  Top 0.406: RL.2 9.71,3.34 J2.2
B/RS2
  Top 0.406: RL1.2 20.57,3.34 J4.2
B/RS3
  Top 0.406: RL2.2 31.43,3.34 J6.2
B/RS4
  Top 0.406: RL3.2 42.29,3.34 J8.2
B/RS5
  Top 0.406: RL4.2 53.15,3.34 J10.2
B/RS6
  Top 0.406: RL5.2 64.01,3.34 J12.2
B/RS7
  Top 0.406: RL6.2 74.87,3.34 J14.2
B/RS8
  Top 0.406: RL7.2 85.73,3.34 J16.2
B/RS9
  Top 0.406: RL8.2 9.71,19.79 J18.2
B/RS10
  Top 0.406: RL9.2 20.57,19.79 J20.2
B/RS11
  Top 0.406: RL10.2 31.43,19.79 J22.2
B/RS12
  Top 0.406: RL11.2 42.29,19.79 J24.2
B/RS13
  Top 0.406: RL12.2 53.15,19.79 J26.2
B/RS14
  Top 0.406: RL13.2 64.01,19.79 J28.2
B/RS15
  Top 0.406: RL14.2 74.87,19.79 J30.2
B/RS16
  Top 0.406: RL15.2 85.73,19.79 J32.2
B/RS17
  Top 0.406: RL16.2 9.71,36.24 J34.2
B/RS18
  Top 0.406: RL17.2 20.57,36.24 J36.2
B/RS19
  Top 0.406: RL18.2 31.43,36.24 J38.2
B/RS20
  Top 0.406: RL19.2 42.29,36.24 J40.2
B/RS21
  Top 0.406: RL20.2 53.15,36.24 J42.2
B/RS22
  Top 0.406: RL21.2 64.01,36.24 J44.2
B/RS23
  Top 0.406: RL22.2 74.87,36.24 J46.2
B/RS24
  Top 0.406: RL23.2 85.73,36.24 J48.2
B/RS25
  Top 0.406: RL24.2 9.71,52.69 J50.2
B/RS26
  Top 0.406: RL25.2 20.57,52.69 J52.2
B/RS27
  Top 0.406: RL26.2 31.43,52.69 J54.2
B/RS28
  Top 0.406: RL27.2 42.29,52.69 J56.2
B/RS29
  Top 0.406: RL28.2 53.15,52.69 J58.2
B/RS30
  Top 0.406: RL29.2 64.01,52.69 J60.2
B/RS31
  Top 0.406: RL30.2 74.87,52.69 J62.2
B/RS32
  Top 0.406: RL31.2 85.73,52.69 J64.2
GND  (via drill 0.51)
  Top 0.406: R1.1 7.59,13.84 v7.46,13.97
  Bottom 0.406: v7.46,13.97 7.46,1.78 7.97,1.27 J2.3
GND1  (via drill 0.51)
  Top 0.406: R2.1 18.45,13.84 v18.32,13.97
  Bottom 0.406: v18.32,13.97 18.32,1.78 18.83,1.27 J4.3
GND2  (via drill 0.51)
  Top 0.406: R3.1 29.31,13.84 v29.18,13.97
  Bottom 0.406: v29.18,13.97 29.18,1.78 29.69,1.27 J6.3
GND3  (via drill 0.51)
  Top 0.406: R4.1 40.17,13.84 v40.04,13.97
  Bottom 0.406: v40.04,13.97 40.04,1.78 40.55,1.27 J8.3
GND4  (via drill 0.51)
  Top 0.406: R5.1 51.03,13.84 v50.9,13.97
  Bottom 0.406: v50.9,13.97 50.9,1.78 51.41,1.27 J10.3
GND5  (via drill 0.51)
  Top 0.406: R6.1 61.89,13.84 v61.76,13.97
  Bottom 0.406: v61.76,13.97 61.76,1.78 62.27,1.27 J12.3
GND6  (via drill 0.51)
  Top 0.406: R7.1 72.75,13.84 v72.62,13.97
  Bottom 0.406: v72.62,13.97 72.62,1.78 73.13,1.27 J14.3
GND7  (via drill 0.51)
  Top 0.406: R8.1 83.61,13.84 v83.48,13.97
  Bottom 0.406: v83.48,13.97 83.48,1.78 83.99,1.27 J16.3
GND8  (via drill 0.51)
  Top 0.406: R9.1 7.59,30.29 v7.46,30.42
  Bottom 0.406: v7.46,30.42 7.46,18.23 7.97,17.72 J18.3
GND9  (via drill 0.51)
  Top 0.406: R10.1 18.45,30.29 v18.32,30.42
  Bottom 0.406: v18.32,30.42 18.32,18.23 18.83,17.72 J20.3
GND10  (via drill 0.51)
  Top 0.406: R11.1 29.31,30.29 v29.18,30.42
  Bottom 0.406: v29.18,30.42 29.18,18.23 29.69,17.72 J22.3
GND11  (via drill 0.51)
  Top 0.406: R12.1 40.17,30.29 v40.04,30.42
  Bottom 0.406: v40.04,30.42 40.04,18.23 40.55,17.72 J24.3
GND12  (via drill 0.51)
  Top 0.406: R13.1 51.03,30.29 v50.9,30.42
  Bottom 0.406: v50.9,30.42 50.9,18.23 51.41,17.72 J26.3
GND13  (via drill 0.51)
  Top 0.406: R14.1 61.89,30.29 v61.76,30.42
  Bottom 0.406: v61.76,30.42 61.76,18.23 62.27,17.72 J28.3
GND14  (via drill 0.51)
  Top 0.406: R15.1 72.75,30.29 v72.62,30.42
  Bottom 0.406: v72.62,30.42 72.62,18.23 73.13,17.72 J30.3
GND15  (via drill 0.51)
  Top 0.406: R16.1 83.61,30.29 v83.48,30.42
  Bottom 0.406: v83.48,30.42 83.48,18.23 83.99,17.72 J32.3
GND16  (via drill 0.51)
  Top 0.406: R17.1 7.59,46.74 v7.46,46.87
  Bottom 0.406: v7.46,46.87 7.46,34.67 7.97,34.17 J34.3
GND17  (via drill 0.51)
  Top 0.406: R18.1 18.45,46.74 v18.32,46.87
  Bottom 0.406: v18.32,46.87 18.32,34.67 18.83,34.17 J36.3
GND18  (via drill 0.51)
  Top 0.406: R19.1 29.31,46.74 v29.18,46.87
  Bottom 0.406: v29.18,46.87 29.18,34.67 29.69,34.17 J38.3
GND19  (via drill 0.51)
  Top 0.406: R20.1 40.17,46.74 v40.04,46.87
  Bottom 0.406: v40.04,46.87 40.04,34.67 40.55,34.17 J40.3
GND20  (via drill 0.51)
  Top 0.406: R21.1 51.03,46.74 v50.9,46.87
  Bottom 0.406: v50.9,46.87 50.9,34.67 51.41,34.17 J42.3
GND21  (via drill 0.51)
  Top 0.406: R22.1 61.89,46.74 v61.76,46.87
  Bottom 0.406: v61.76,46.87 61.76,34.67 62.27,34.17 J44.3
GND22  (via drill 0.51)
  Top 0.406: R23.1 72.75,46.74 v72.62,46.87
  Bottom 0.406: v72.62,46.87 72.62,34.67 73.13,34.17 J46.3
GND23  (via drill 0.51)
  Top 0.406: R24.1 83.61,46.74 v83.48,46.87
  Bottom 0.406: v83.48,46.87 83.48,34.67 83.99,34.17 J48.3
GND24  (via drill 0.51)
  Top 0.406: R25.1 7.59,63.19 v7.46,63.31
  Bottom 0.406: v7.46,63.31 7.46,51.12 7.97,50.61 J50.3
GND25  (via drill 0.51)
  Top 0.406: R26.1 18.45,63.19 v18.32,63.31
  Bottom 0.406: v18.32,63.31 18.32,51.12 18.83,50.61 J52.3
GND26  (via drill 0.51)
  Top 0.406: R27.1 29.31,63.19 v29.18,63.31
  Bottom 0.406: v29.18,63.31 29.18,51.12 29.69,50.61 J54.3
GND27  (via drill 0.51)
  Top 0.406: R28.1 40.17,63.19 v40.04,63.31
  Bottom 0.406: v40.04,63.31 40.04,51.12 40.55,50.61 J56.3
GND28  (via drill 0.51)
  Top 0.406: R29.1 51.03,63.19 v50.9,63.31
  Bottom 0.406: v50.9,63.31 50.9,51.12 51.41,50.61 J58.3
GND29  (via drill 0.51)
  Top 0.406: R30.1 61.89,63.19 v61.76,63.31
  Bottom 0.406: v61.76,63.31 61.76,51.12 62.27,50.61 J60.3
GND30  (via drill 0.51)
  Top 0.406: R31.1 72.75,63.19 v72.62,63.31
  Bottom 0.406: v72.62,63.31 72.62,51.12 73.13,50.61 J62.3
GND31  (via drill 0.51)
  Top 0.406: R32.1 83.61,63.19 v83.48,63.31
  Bottom 0.406: v83.48,63.31 83.48,51.12 83.99,50.61 J64.3
H/RH1  (via drill 0.51)
  Top 0.406: U1.F 25.29,6.6 v23.4,6.6 22.64,7.37 J3.2
  Bottom 0.406: JS4.1 23.91,6.1 v23.4,6.6
H/RH2  (via drill 0.51)
  Top 0.406: U2.F 14.43,6.6 v12.54,6.6 11.78,7.37 J1.2
  Bottom 0.406: JS2.1 13.05,6.1 v12.54,6.6
H/RH3  (via drill 0.51)
  Top 0.406: U3.F 36.15,6.6 v34.26,6.6 33.5,7.37 J5.2
  Bottom 0.406: JS6.1 34.77,6.1 v34.26,6.6
H/RH4  (via drill 0.51)
  Top 0.406: U4.F 47.01,6.6 v45.12,6.6 44.36,7.37 J7.2
  Bottom 0.406: JS8.1 45.63,6.1 v45.12,6.6
H/RH5  (via drill 0.51)
  Top 0.406: U5.F 57.87,6.6 v55.98,6.6 55.22,7.37 J9.2
  Bottom 0.406: JS10.1 56.49,6.1 v55.98,6.6
H/RH6  (via drill 0.51)
  Top 0.406: U6.F 68.73,6.6 v66.84,6.6 66.08,7.37 J11.2
  Bottom 0.406: JS12.1 67.35,6.1 v66.84,6.6
H/RH7  (via drill 0.51)
  Top 0.406: U7.F 79.59,6.6 v77.7,6.6 76.94,7.37 J13.2
  Bottom 0.406: JS14.1 78.21,6.1 v77.7,6.6
H/RH8  (via drill 0.51)
  Top 0.406: U8.F 90.45,6.6 v88.56,6.6 87.8,7.37 J15.2
  Bottom 0.406: JS16.1 89.07,6.1 v88.56,6.6
H/RH9  (via drill 0.51)
  Top 0.406: U9.F 14.43,23.05 v12.54,23.05 11.78,23.81 J17.2
  Bottom 0.406: JS18.1 13.05,22.54 v12.54,23.05
H/RH10  (via drill 0.51)
  Top 0.406: U10.F 25.29,23.05 v23.4,23.05 22.64,23.81 J19.2
  Bottom 0.406: JS20.1 23.91,22.54 v23.4,23.05
H/RH11  (via drill 0.51)
  Top 0.406: U11.F 36.15,23.05 v34.26,23.05 33.5,23.81 J21.2
  Bottom 0.406: JS22.1 34.77,22.54 v34.26,23.05
H/RH12  (via drill 0.51)
  Top 0.406: U12.F 47.01,23.05 v45.12,23.05 44.36,23.81 J23.2
  Bottom 0.406: JS24.1 45.63,22.54 v45.12,23.05
H/RH13  (via drill 0.51)
  Top 0.406: U13.F 57.87,23.05 v55.98,23.05 55.22,23.81 J25.2
  Bottom 0.406: JS26.1 56.49,22.54 v55.98,23.05
H/RH14  (via drill 0.51)
  Top 0.406: U14.F 68.73,23.05 v66.84,23.05 66.08,23.81 J27.2
  Bottom 0.406: JS28.1 67.35,22.54 v66.84,23.05
H/RH15  (via drill 0.51)
  Top 0.406: U15.F 79.59,23.05 v77.7,23.05 76.94,23.81 J29.2
  Bottom 0.406: JS30.1 78.21,22.54 v77.7,23.05
H/RH16  (via drill 0.51)
  Top 0.406: U16.F 90.45,23.05 v88.56,23.05 87.8,23.81 J31.2
  Bottom 0.406: JS32.1 89.07,22.54 v88.56,23.05
H/RH17  (via drill 0.51)
  Top 0.406: U17.F 14.43,39.5 v12.54,39.5 11.78,40.26 J33.2
  Bottom 0.406: JS34.1 13.05,38.99 v12.54,39.5
H/RH18  (via drill 0.51)
  Top 0.406: U18.F 25.29,39.5 v23.4,39.5 22.64,40.26 J35.2
  Bottom 0.406: JS36.1 23.91,38.99 v23.4,39.5
H/RH19  (via drill 0.51)
  Top 0.406: U19.F 36.15,39.5 v34.26,39.5 33.5,40.26 J37.2
  Bottom 0.406: JS38.1 34.77,38.99 v34.26,39.5
H/RH20  (via drill 0.51)
  Top 0.406: U20.F 47.01,39.5 v45.12,39.5 44.36,40.26 J39.2
  Bottom 0.406: JS40.1 45.63,38.99 v45.12,39.5
H/RH21  (via drill 0.51)
  Top 0.406: U21.F 57.87,39.5 v55.98,39.5 55.22,40.26 J41.2
  Bottom 0.406: JS42.1 56.49,38.99 v55.98,39.5
H/RH22  (via drill 0.51)
  Top 0.406: U22.F 68.73,39.5 v66.84,39.5 66.08,40.26 J43.2
  Bottom 0.406: JS44.1 67.35,38.99 v66.84,39.5
H/RH23  (via drill 0.51)
  Top 0.406: U23.F 79.59,39.5 v77.7,39.5 76.94,40.26 J45.2
  Bottom 0.406: JS46.1 78.21,38.99 v77.7,39.5
H/RH24  (via drill 0.51)
  Top 0.406: U24.F 90.45,39.5 v88.56,39.5 87.8,40.26 J47.2
  Bottom 0.406: JS48.1 89.07,38.99 v88.56,39.5
H/RH25  (via drill 0.51)
  Top 0.406: U25.F 14.43,55.95 v12.54,55.95 11.78,56.71 J49.2
  Bottom 0.406: JS50.1 13.05,55.44 v12.54,55.95
H/RH26  (via drill 0.51)
  Top 0.406: U26.F 25.29,55.95 v23.4,55.95 22.64,56.71 J51.2
  Bottom 0.406: JS52.1 23.91,55.44 v23.4,55.95
H/RH27  (via drill 0.51)
  Top 0.406: U27.F 36.15,55.95 v34.26,55.95 33.5,56.71 J53.2
  Bottom 0.406: JS54.1 34.77,55.44 v34.26,55.95
H/RH28  (via drill 0.51)
  Top 0.406: U28.F 47.01,55.95 v45.12,55.95 44.36,56.71 J55.2
  Bottom 0.406: JS56.1 45.63,55.44 v45.12,55.95
H/RH29  (via drill 0.51)
  Top 0.406: U29.F 57.87,55.95 v55.98,55.95 55.22,56.71 J57.2
  Bottom 0.406: JS58.1 56.49,55.44 v55.98,55.95
H/RH30  (via drill 0.51)
  Top 0.406: U30.F 68.73,55.95 v66.84,55.95 66.08,56.71 J59.2
  Bottom 0.406: JS60.1 67.35,55.44 v66.84,55.95
H/RH31  (via drill 0.51)
  Top 0.406: U31.F 79.59,55.95 v77.7,55.95 76.94,56.71 J61.2
  Bottom 0.406: JS62.1 78.21,55.44 v77.7,55.95
H/RH32  (via drill 0.51)
  Top 0.406: U32.F 90.45,55.95 v88.56,55.95 87.8,56.71 J63.2
  Bottom 0.406: JS64.1 89.07,55.44 v88.56,55.95
J/RS1
  Top 0.406: U1.G 26.45,7.87 26.96,8.38 26.96,12.7 J3.1
  Bottom 0.406: JS3.1 26.45,13.21 J3.1
J/RS2
  Top 0.406: U2.G 15.59,7.87 16.1,8.38 16.1,12.7 J1.1
  Bottom 0.406: JS1.1 15.59,13.21 J1.1
J/RS3
  Top 0.406: U3.G 37.31,7.87 37.82,8.38 37.82,12.7 J5.1
  Bottom 0.406: JS5.1 37.31,13.21 J5.1
J/RS4
  Top 0.406: U4.G 48.17,7.87 48.68,8.38 48.68,12.7 J7.1
  Bottom 0.406: JS7.1 48.17,13.21 J7.1
J/RS5
  Top 0.406: U5.G 59.03,7.87 59.54,8.38 59.54,12.7 J9.1
  Bottom 0.406: JS9.1 59.03,13.21 J9.1
J/RS6
  Top 0.406: U6.G 69.89,7.87 70.4,8.38 70.4,12.7 J11.1
  Bottom 0.406: JS11.1 69.89,13.21 J11.1
J/RS7
  Top 0.406: U7.G 80.75,7.87 81.26,8.38 81.26,12.7 J13.1
  Bottom 0.406: JS13.1 80.75,13.21 J13.1
J/RS8
  Top 0.406: U8.G 91.61,7.87 92.12,8.38 92.12,12.7 J15.1
  Bottom 0.406: JS15.1 91.61,13.21 J15.1
J/RS9
  Top 0.406: U9.G 15.59,24.32 16.1,24.83 16.1,29.15 J17.1
  Bottom 0.406: JS17.1 15.59,29.66 J17.1
J/RS10
  Top 0.406: U10.G 26.45,24.32 26.96,24.83 26.96,29.15 J19.1
  Bottom 0.406: JS19.1 26.45,29.66 J19.1
J/RS11
  Top 0.406: U11.G 37.31,24.32 37.82,24.83 37.82,29.15 J21.1
  Bottom 0.406: JS21.1 37.31,29.66 J21.1
J/RS12
  Top 0.406: U12.G 48.17,24.32 48.68,24.83 48.68,29.15 J23.1
  Bottom 0.406: JS23.1 48.17,29.66 J23.1
J/RS13
  Top 0.406: U13.G 59.03,24.32 59.54,24.83 59.54,29.15 J25.1
  Bottom 0.406: JS25.1 59.03,29.66 J25.1
J/RS14
  Top 0.406: U14.G 69.89,24.32 70.4,24.83 70.4,29.15 J27.1
  Bottom 0.406: JS27.1 69.89,29.66 J27.1
J/RS15
  Top 0.406: U15.G 80.75,24.32 81.26,24.83 81.26,29.15 J29.1
  Bottom 0.406: JS29.1 80.75,29.66 J29.1
J/RS16
  Top 0.406: U16.G 91.61,24.32 92.12,24.83 92.12,29.15 J31.1
  Bottom 0.406: JS31.1 91.61,29.66 J31.1
J/RS17
  Top 0.406: U17.G 15.59,40.77 16.1,41.28 16.1,45.6 J33.1
  Bottom 0.406: JS33.1 15.59,46.1 J33.1
J/RS18
  Top 0.406: U18.G 26.45,40.77 26.96,41.28 26.96,45.6 J35.1
  Bottom 0.406: JS35.1 26.45,46.1 J35.1
J/RS19
  Top 0.406: U19.G 37.31,40.77 37.82,41.28 37.82,45.6 J37.1
  Bottom 0.406: JS37.1 37.31,46.1 J37.1
J/RS20
  Top 0.406: U20.G 48.17,40.77 48.68,41.28 48.68,45.6 J39.1
  Bottom 0.406: JS39.1 48.17,46.1 J39.1
J/RS21
  Top 0.406: U21.G 59.03,40.77 59.54,41.28 59.54,45.6 J41.1
  Bottom 0.406: JS41.1 59.03,46.1 J41.1
J/RS22
  Top 0.406: U22.G 69.89,40.77 70.4,41.28 70.4,45.6 J43.1
  Bottom 0.406: JS43.1 69.89,46.1 J43.1
J/RS23
  Top 0.406: U23.G 80.75,40.77 81.26,41.28 81.26,45.6 J45.1
  Bottom 0.406: JS45.1 80.75,46.1 J45.1
J/RS24
  Top 0.406: U24.G 91.61,40.77 92.12,41.28 92.12,45.6 J47.1
  Bottom 0.406: JS47.1 91.61,46.1 J47.1
J/RS25
  Top 0.406: U25.G 15.59,57.22 16.1,57.73 16.1,62.04 J49.1
  Bottom 0.406: JS49.1 15.59,62.55 J49.1
J/RS26
  Top 0.406: U26.G 26.45,57.22 26.96,57.73 26.96,62.04 J51.1
  Bottom 0.406: JS51.1 26.45,62.55 J51.1
J/RS27
  Top 0.406: U27.G 37.31,57.22 37.82,57.73 37.82,62.04 J53.1
  Bottom 0.406: JS53.1 37.31,62.55 J53.1
J/RS28
  Top 0.406: U28.G 48.17,57.22 48.68,57.73 48.68,62.04 J55.1
  Bottom 0.406: JS55.1 48.17,62.55 J55.1
J/RS29
  Top 0.406: U29.G 59.03,57.22 59.54,57.73 59.54,62.04 J57.1
  Bottom 0.406: JS57.1 59.03,62.55 J57.1
J/RS30
  Top 0.406: U30.G 69.89,57.22 70.4,57.73 70.4,62.04 J59.1
  Bottom 0.406: JS59.1 69.89,62.55 J59.1
J/RS31
  Top 0.406: U31.G 80.75,57.22 81.26,57.73 81.26,62.04 J61.1
  Bottom 0.406: JS61.1 80.75,62.55 J61.1
J/RS32
  Top 0.406: U32.G 91.61,57.22 92.12,57.73 92.12,62.04 J63.1
  Bottom 0.406: JS63.1 91.61,62.55 J63.1
N$1
  Top 0.406: RL.1 9.97,5.04 U2.D
N$2
  Top 0.406: RL1.1 20.83,5.04 U1.D
N$3
  Top 0.406: RL2.1 31.69,5.04 U3.D
N$4
  Top 0.406: RL3.1 42.55,5.04 U4.D
N$5
  Top 0.406: RL4.1 53.41,5.04 U5.D
N$6
  Top 0.406: RL5.1 64.27,5.04 U6.D
N$7
  Top 0.406: RL6.1 75.13,5.04 U7.D
N$8
  Top 0.406: RL7.1 85.99,5.04 U8.D
N$9
  Top 0.406: RL8.1 9.97,21.49 U9.D
N$10
  Top 0.406: RL9.1 20.83,21.49 U10.D
N$11
  Top 0.406: RL10.1 31.69,21.49 U11.D
N$12
  Top 0.406: RL11.1 42.55,21.49 U12.D
N$13
  Top 0.406: RL12.1 53.41,21.49 U13.D
N$14
  Top 0.406: RL13.1 64.27,21.49 U14.D
N$15
  Top 0.406: RL14.1 75.13,21.49 U15.D
N$16
  Top 0.406: RL15.1 85.99,21.49 U16.D
N$17
  Top 0.406: RL16.1 9.97,37.94 U17.D
N$18
  Top 0.406: RL17.1 20.83,37.94 U18.D
N$19
  Top 0.406: RL18.1 31.69,37.94 U19.D
N$20
  Top 0.406: RL19.1 42.55,37.94 U20.D
N$21
  Top 0.406: RL20.1 53.41,37.94 U21.D
N$22
  Top 0.406: RL21.1 64.27,37.94 U22.D
N$23
  Top 0.406: RL22.1 75.13,37.94 U23.D
N$24
  Top 0.406: RL23.1 85.99,37.94 U24.D
N$25
  Top 0.406: RL24.1 9.97,54.38 U25.D
N$26
  Top 0.406: RL25.1 20.83,54.38 U26.D
N$27
  Top 0.406: RL26.1 31.69,54.38 U27.D
N$28
  Top 0.406: RL27.1 42.55,54.38 U28.D
N$29
  Top 0.406: RL28.1 53.41,54.38 U29.D
N$30
  Top 0.406: RL29.1 64.27,54.38 U30.D
N$31
  Top 0.406: RL30.1 75.13,54.38 U31.D
N$32
  Top 0.406: RL31.1 85.99,54.38 U32.D

## Text on the board
tPlace: Rh1 | Rh2 | Rs2 | v1.0 | Rh1 | Rh2 | Rs2 | v1.0 | Rh1 | Rh2 | Rs2 | v1.0 | Rh1 | Rh2 | Rs2 | v1.0 | Rh1 | Rh2 | Rs2 | v1.0 | Rh1 | Rh2 | Rs2 | v1.0 | Rh1 | Rh2 | Rs2 | v1.0 | Rh1 | Rh2 | Rs2 | v1.0 | CO | CO | CO | CO | CO | CO | CO | CO | GND | Rs1 | 5V | GND | Rs1 | 5V | GND | Rs1 | 5V | GND | Rs1 | 5V | GND | Rs1 | 5V | GND | Rs1 | 5V | GND | Rs1 | 5V | GND | Rs1 | 5V | Rh1 | Rh2 | Rs2 | v1.0 | Rh1 | Rh2 | Rs2 | v1.0 | Rh1 | Rh2 | Rs2 | v1.0 | Rh1 | Rh2 | Rs2 | v1.0 | Rh1 | Rh2 | Rs2 | v1.0 | Rh1 | Rh2 | Rs2 | v1.0 | Rh1 | Rh2 | Rs2 | v1.0 | Rh1 | Rh2 | Rs2 | v1.0 | CO | CO | CO | CO | CO | CO | CO | CO | GND | Rs1 | 5V | GND | Rs1 | 5V | GND | Rs1 | 5V | GND | Rs1 | 5V | GND | Rs1 | 5V | GND | Rs1 | 5V | GND | Rs1 | 5V | GND | Rs1 | 5V | Rh1 | Rh2 | Rs2 | v1.0 | Rh1 | Rh2 | Rs2 | v1.0 | Rh1 | Rh2 | Rs2 | v1.0 | Rh1 | Rh2 | Rs2 | v1.0 | Rh1 | Rh2 | Rs2 | v1.0 | Rh1 | Rh2 | Rs2 | v1.0 | Rh1 | Rh2 | Rs2 | v1.0 | Rh1 | Rh2 | Rs2 | v1.0 | CO | CO | CO | CO | CO | CO | CO | CO | GND | Rs1 | 5V | GND | Rs1 | 5V | GND | Rs1 | 5V | GND | Rs1 | 5V | GND | Rs1 | 5V | GND | Rs1 | 5V | GND | Rs1 | 5V | GND | Rs1 | 5V | Rh1 | Rh2 | Rs2 | v1.0 | Rh1 | Rh2 | Rs2 | v1.0 | Rh1 | Rh2 | Rs2 | v1.0 | Rh1 | Rh2 | Rs2 | v1.0 | Rh1 | Rh2 | Rs2 | v1.0 | Rh1 | Rh2 | Rs2 | v1.0 | Rh1 | Rh2 | Rs2 | v1.0 | Rh1 | Rh2 | Rs2 | v1.0 | CO | CO | CO | CO | CO | CO | CO | CO | GND | Rs1 | 5V | GND | Rs1 | 5V | GND | Rs1 | 5V | GND | Rs1 | 5V | GND | Rs1 | 5V | GND | Rs1 | 5V | GND | Rs1 | 5V | GND | Rs1 | 5V
bPlace: Rh1 | Rh2 | Rs2 | Rh1 | Rh2 | Rs2 | Rh1 | Rh2 | Rs2 | Rh1 | Rh2 | Rs2 | Rh1 | Rh2 | Rs2 | Rh1 | Rh2 | Rs2 | Rh1 | Rh2 | Rs2 | Rh1 | Rh2 | Rs2 | acrobotic.com | acrobotic.com | acrobotic.com | acrobotic.com | acrobotic.com | acrobotic.com | acrobotic.com | acrobotic.com | Rs1 | Rh1 | Rs1 | Rh1 | Rs1 | Rh1 | Rs1 | Rh1 | Rs1 | Rh1 | Rs1 | Rh1 | Rs1 | Rh1 | Rs1 | Rh1 | GND | Rs1 | 5V | GND | Rs1 | 5V | GND | Rs1 | 5V | GND | Rs1 | 5V | GND | Rs1 | 5V | GND | Rs1 | 5V | GND | Rs1 | 5V | GND | Rs1 | 5V | Rh1 | Rh2 | Rs2 | Rh1 | Rh2 | Rs2 | Rh1 | Rh2 | Rs2 | Rh1 | Rh2 | Rs2 | Rh1 | Rh2 | Rs2 | Rh1 | Rh2 | Rs2 | Rh1 | Rh2 | Rs2 | Rh1 | Rh2 | Rs2 | acrobotic.com | acrobotic.com | acrobotic.com | acrobotic.com | acrobotic.com | acrobotic.com | acrobotic.com | acrobotic.com | Rs1 | Rh1 | Rs1 | Rh1 | Rs1 | Rh1 | Rs1 | Rh1 | Rs1 | Rh1 | Rs1 | Rh1 | Rs1 | Rh1 | Rs1 | Rh1 | GND | Rs1 | 5V | GND | Rs1 | 5V | GND | Rs1 | 5V | GND | Rs1 | 5V | GND | Rs1 | 5V | GND | Rs1 | 5V | GND | Rs1 | 5V | GND | Rs1 | 5V | Rh1 | Rh2 | Rs2 | Rh1 | Rh2 | Rs2 | Rh1 | Rh2 | Rs2 | Rh1 | Rh2 | Rs2 | Rh1 | Rh2 | Rs2 | Rh1 | Rh2 | Rs2 | Rh1 | Rh2 | Rs2 | Rh1 | Rh2 | Rs2 | acrobotic.com | acrobotic.com | acrobotic.com | acrobotic.com | acrobotic.com | acrobotic.com | acrobotic.com | acrobotic.com | Rs1 | Rh1 | Rs1 | Rh1 | Rs1 | Rh1 | Rs1 | Rh1 | Rs1 | Rh1 | Rs1 | Rh1 | Rs1 | Rh1 | Rs1 | Rh1 | GND | Rs1 | 5V | GND | Rs1 | 5V | GND | Rs1 | 5V | GND | Rs1 | 5V | GND | Rs1 | 5V | GND | Rs1 | 5V | GND | Rs1 | 5V | GND | Rs1 | 5V | Rh1 | Rh2 | Rs2 | Rh1 | Rh2 | Rs2 | Rh1 | Rh2 | Rs2 | Rh1 | Rh2 | Rs2 | Rh1 | Rh2 | Rs2 | Rh1 | Rh2 | Rs2 | Rh1 | Rh2 | Rs2 | Rh1 | Rh2 | Rs2 | acrobotic.com | acrobotic.com | acrobotic.com | acrobotic.com | acrobotic.com | acrobotic.com | acrobotic.com | acrobotic.com | Rs1 | Rh1 | Rs1 | Rh1 | Rs1 | Rh1 | Rs1 | Rh1 | Rs1 | Rh1 | Rs1 | Rh1 | Rs1 | Rh1 | Rs1 | Rh1 | GND | Rs1 | 5V | GND | Rs1 | 5V | GND | Rs1 | 5V | GND | Rs1 | 5V | GND | Rs1 | 5V | GND | Rs1 | 5V | GND | Rs1 | 5V | GND | Rs1 | 5V